# EAGLE board SoM-BOTTOM (EAGLE 8.7.1)
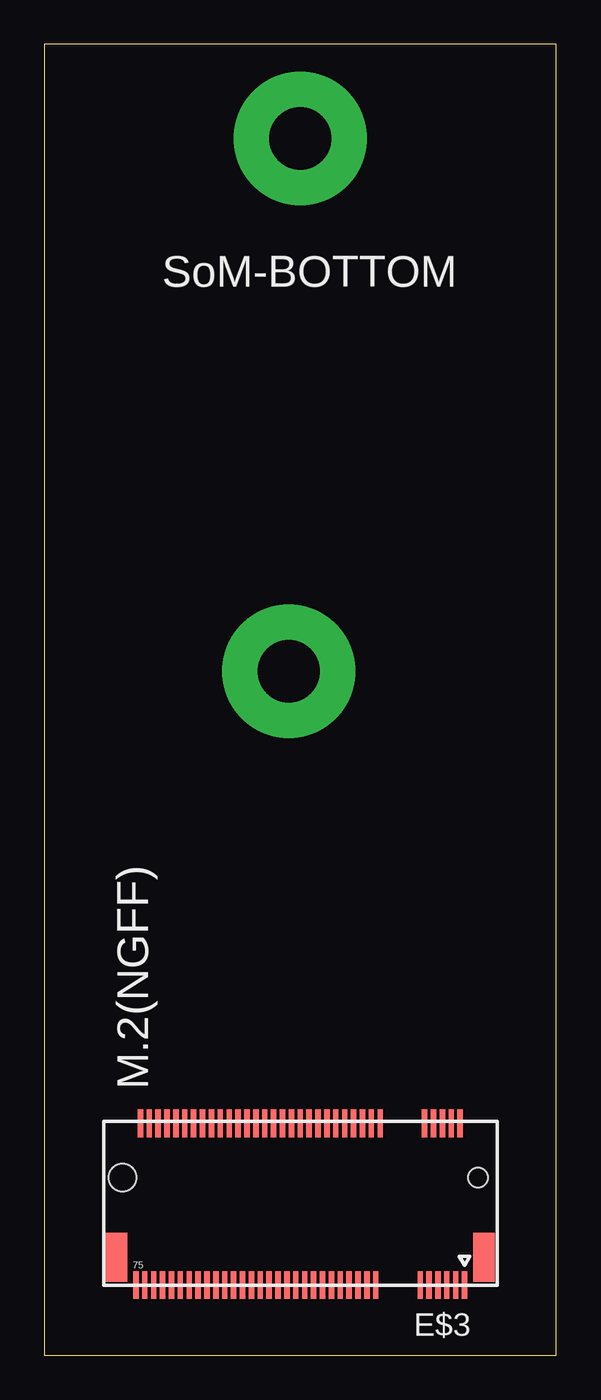
[diagram p0: board, top side]

Size 28.8 x 73.8 mm. Coordinates in mm from the lower left corner, seen from the top.
Outline: 0,0 28.8,0 28.8,73.8 0,73.8 0,0
Copper layers (1*16): Top 0.035mm / dielectric 1.5mm / Bottom 0.035mm
Design rules "default": minimum track width 6mil, minimum drill 0.35mm, track to track 6mil, track to pad 6mil, pad to pad 6mil, via to via 6mil, smd to smd 6mil, copper to edge 40mil, drill to drill 6mil, minimum pad ring 10mil, minimum via ring 8mil, stop-mask expansion 4mil, vias tented up to drill 0mil, thermal gap 10mil

## Footprints (pad centres in the part's own frame; a part is rotated, then mirrored left to right if it is on the bottom)
M.2-2199230-8 = smd 0.3 x 1.55: 1 -9.25,4.55; 2 -9,-4.55; 3 -8.75,4.55; 4 -8.5,-4.55; 5 -8.25,4.55; 6 -8,-4.55; 7 -7.75,4.55; 8 -7.5,-4.55; 9 -7.25,4.55; 10 -7,-4.55; 11 -6.75,4.55; 20 -4.5,-4.55; 21 -4.25,4.55; 22 -4,-4.55; 23 -3.75,4.55; 24 -3.5,-4.55; 25 -3.25,4.55; 26 -3,-4.55; 27 -2.75,4.55; 28 -2.5,-4.55; 29 -2.25,4.55; 30 -2,-4.55; 31 -1.75,4.55; 32 -1.5,-4.55; 33 -1.25,4.55; 34 -1,-4.55; 35 -0.75,4.55; 36 -0.5,-4.55; 37 -0.25,4.55; 38 0,-4.55; 39 0.25,4.55; 40 0.5,-4.55; 41 0.75,4.55; 42 1,-4.55; 43 1.25,4.55; 44 1.5,-4.55; 45 1.75,4.55; 46 2,-4.55; 47 2.25,4.55; 48 2.5,-4.55; 49 2.75,4.55; 50 3,-4.55; 51 3.25,4.55; 52 3.5,-4.55; 53 3.75,4.55; 54 4,-4.55; 55 4.25,4.55; 56 4.5,-4.55; 57 4.75,4.55; 58 5,-4.55; 59 5.25,4.55; 60 5.5,-4.55; 61 5.75,4.55; 62 6,-4.55; 63 6.25,4.55; 64 6.5,-4.55; 65 6.75,4.55; 66 7,-4.55; 67 7.25,4.55; 68 7.5,-4.55; 69 7.75,4.55; 70 8,-4.55; 71 8.25,4.55; 72 8.5,-4.55; 73 8.75,4.55; 74 9,-4.55; 75 9.25,4.55 | smd 1.2 x 2.75: 76 10.35,3; 77 -10.35,3 | hole 1.1: -10,-1.5 | hole 1.55: 10,-1.5

## Placement (x,y rotation side)
E$3  [M.2-2199230-8]  14.4,8.5 180 top
U$31  SPARK_LOGO  [SPARK_LOGO_TSTOP]  20.62,63.82 0 top

## Library data of the parts
E$3 U$31 = Spark

## Tracks (layer width: path | path; a pad name or v marks a point on that pad's centre or on a via)
S$2  (via drill 3.5 pad 7.5)
  other vias: 14.4,68.5 13.75,38.5

## Text on the board
tNames: SoM-BOTTOM | M.2(NGFF)